# EAGLE board untitled (EAGLE 7.1.0)
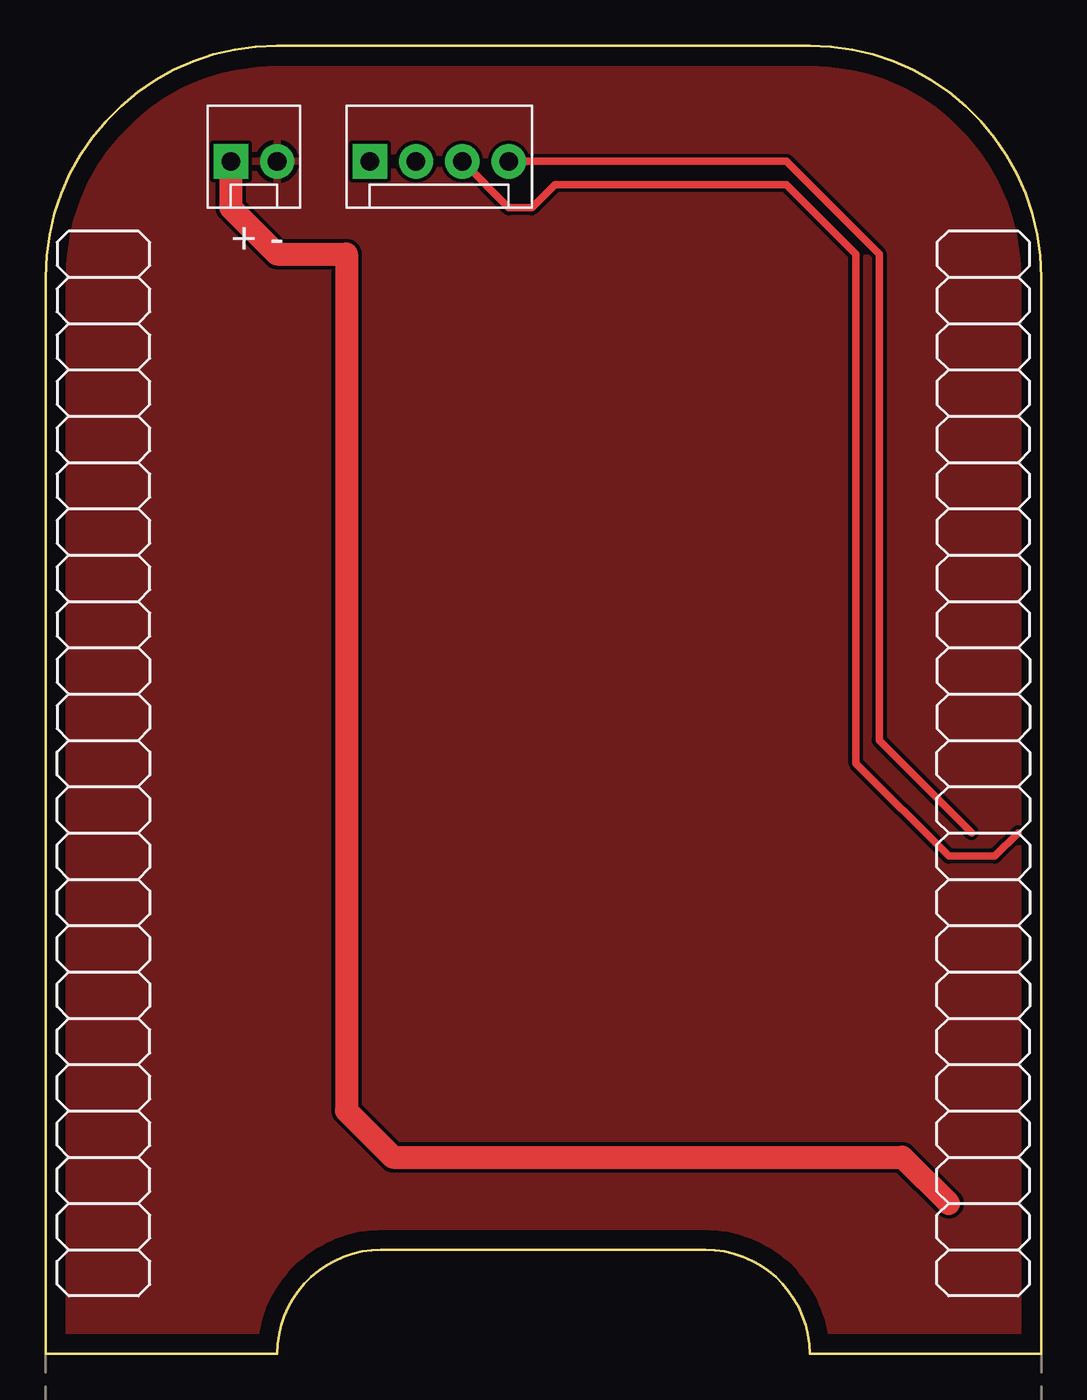
[diagram p0: board, top side]
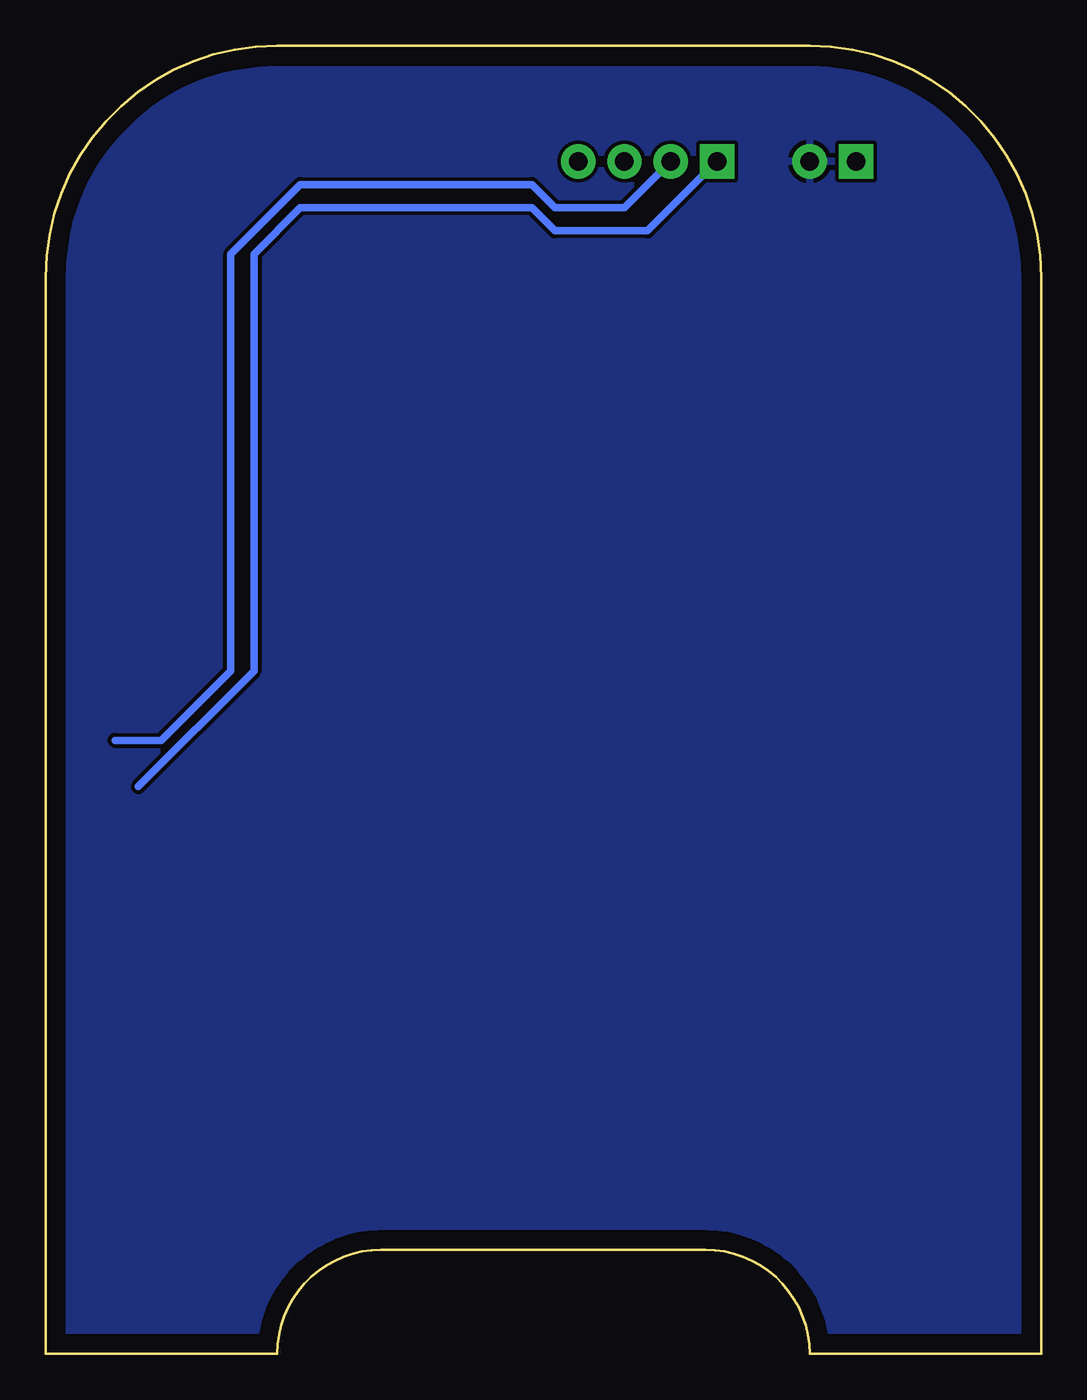
[diagram p1: board, bottom side, seen from below]

Size 54.61 x 71.75 mm. Coordinates in mm from the lower left corner, seen from the top.
Outline: 54.61,59.06 54.61,0 41.91,0 arc90 36.2,5.71 18.41,5.71 arc90 12.7,0 0,0 0,59.06 arc-90 12.7,71.75 41.91,71.75 arc-90 54.61,59.06
Copper layers (1*16): Top 0.035mm / dielectric 1.5mm / Bottom 0.035mm
Design rules "default": minimum track width 10mil, minimum drill 24mil, track to track 8mil, track to pad 8mil, pad to pad 8mil, via to via 8mil, smd to smd 8mil, copper to edge 40mil, drill to drill 8mil, minimum pad ring 10mil, minimum via ring 8mil, stop-mask expansion 4mil, vias tented up to drill 0mil, thermal gap 10mil

## Footprints (pad centres in the part's own frame; a part is rotated, then mirrored left to right if it is on the bottom)
MOLEX-1X2 = drill 1.016 pad 1.88 square: 1 0,0 | drill 1.016 pad 1.88: 2 2.54,0
MOLEX-1X4 = drill 1.016 pad 1.88 square: 1 0,0 | drill 1.016 pad 1.88: 2 2.54,0; 3 5.08,0; 4 7.62,0

## Placement (x,y rotation side)
PWR  M02POLAR  [MOLEX-1X2]  10.16,65.41 0 top
SERIAL  [MOLEX-1X4]  17.78,65.41 0 top

## Library data of the parts
PWR SERIAL = SparkFun-Connectors

## Nets
GND: PWR.2
N$1: SERIAL.1
N$3: SERIAL.4
N$5: PWR.1
N$6: SERIAL.3
N$7: SERIAL.2

## Tracks (layer width: path | path; a pad name or v marks a point on that pad's centre or on a via)
GND
  pour Bottom: 41.91,70.48 11.43,70.48 arc90 0,59.06 0,-0.63 12.7,-0.63 arc-90 19.05,4.45 36.83,4.45 arc-90 41.91,-0.63 54.61,-0.63 54.61,57.78 arc90
  pour Top: 12.7,70.48 11.43,70.48 arc90 0,59.06 0,-0.63 12.7,-0.63 arc-90 17.78,4.45 36.83,4.45 arc-90 41.91,-0.63 54.61,-0.63 54.61,57.78 arc90 41.91,70.48
N$1
  Bottom 0.406: SERIAL.1 21.59,61.59 26.67,61.59 27.94,62.86 40.64,62.86 43.18,60.33 43.18,37.47 49.53,31.12
N$3
  Top 0.406: SERIAL.4 40.64,65.41 45.72,60.33 45.72,33.66 50.8,28.58
N$5
  Top 1.27: PWR.1 10.16,62.86 12.7,60.33 16.51,60.33 16.51,13.34 19.05,10.8 46.99,10.8 49.53,8.25
N$6
  Top 0.406: 53.34,28.58 52.07,27.3 49.53,27.3 44.45,32.38 44.45,60.33 40.64,64.14 27.94,64.14 26.67,62.86 25.4,62.86 SERIAL.3
N$7
  Bottom 0.406: 50.8,33.66 48.26,33.66 44.45,37.47 44.45,60.33 40.64,64.14 27.94,64.14 26.67,62.86 22.86,62.86 SERIAL.2

## Text on the board
tNames: + -
tDocu: P8 | P9